# Altium PCB PCB1.pcbdoc (part 1 of 3)
Units mm, origin at the board's own origin, x right, y up, seen from the top; angles counter-clockwise.
Board outline 85.01 x 107.37 mm, 4 copper layers (Top Layer, Inner1, Inner2, Bottom Layer); 103 components, 145 nets, 649 pads, 270 vias.
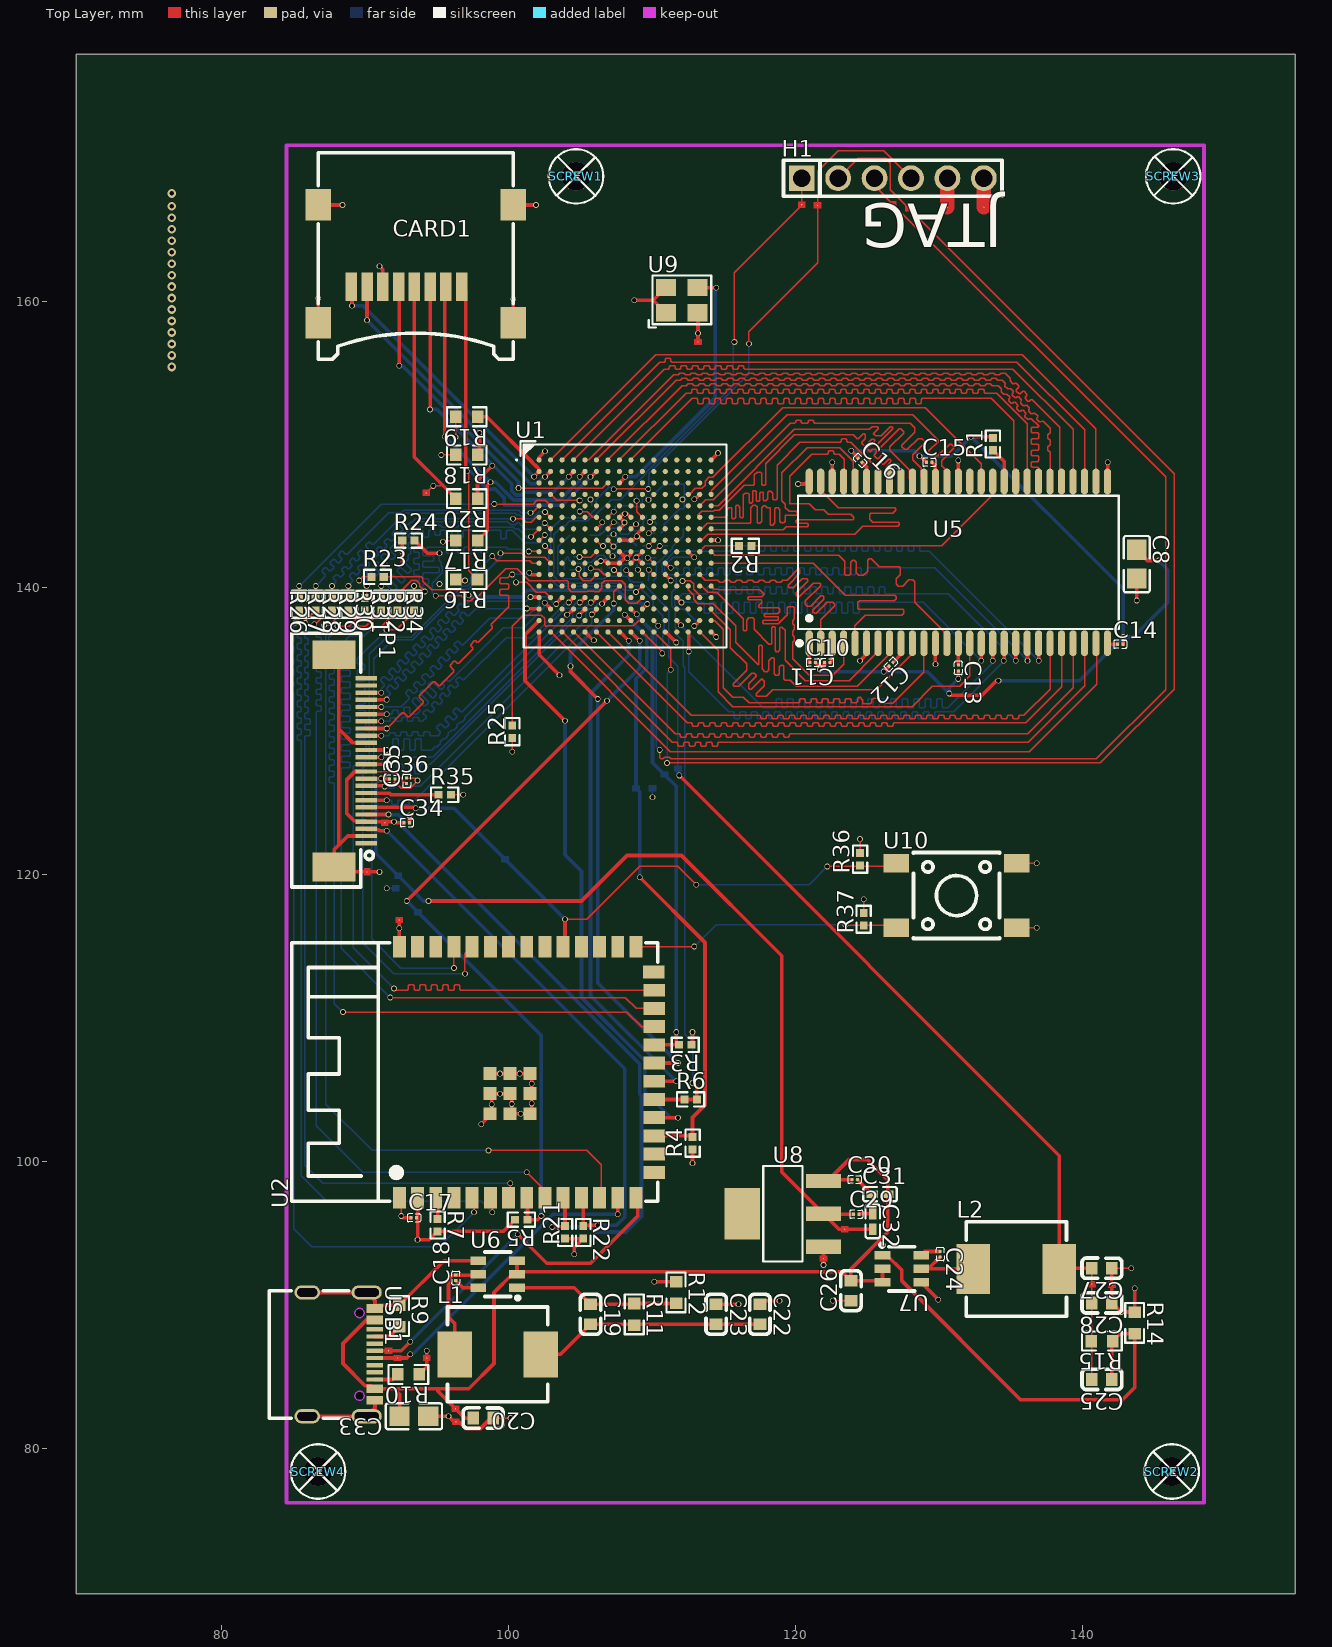
[diagram p0: Top Layer view]
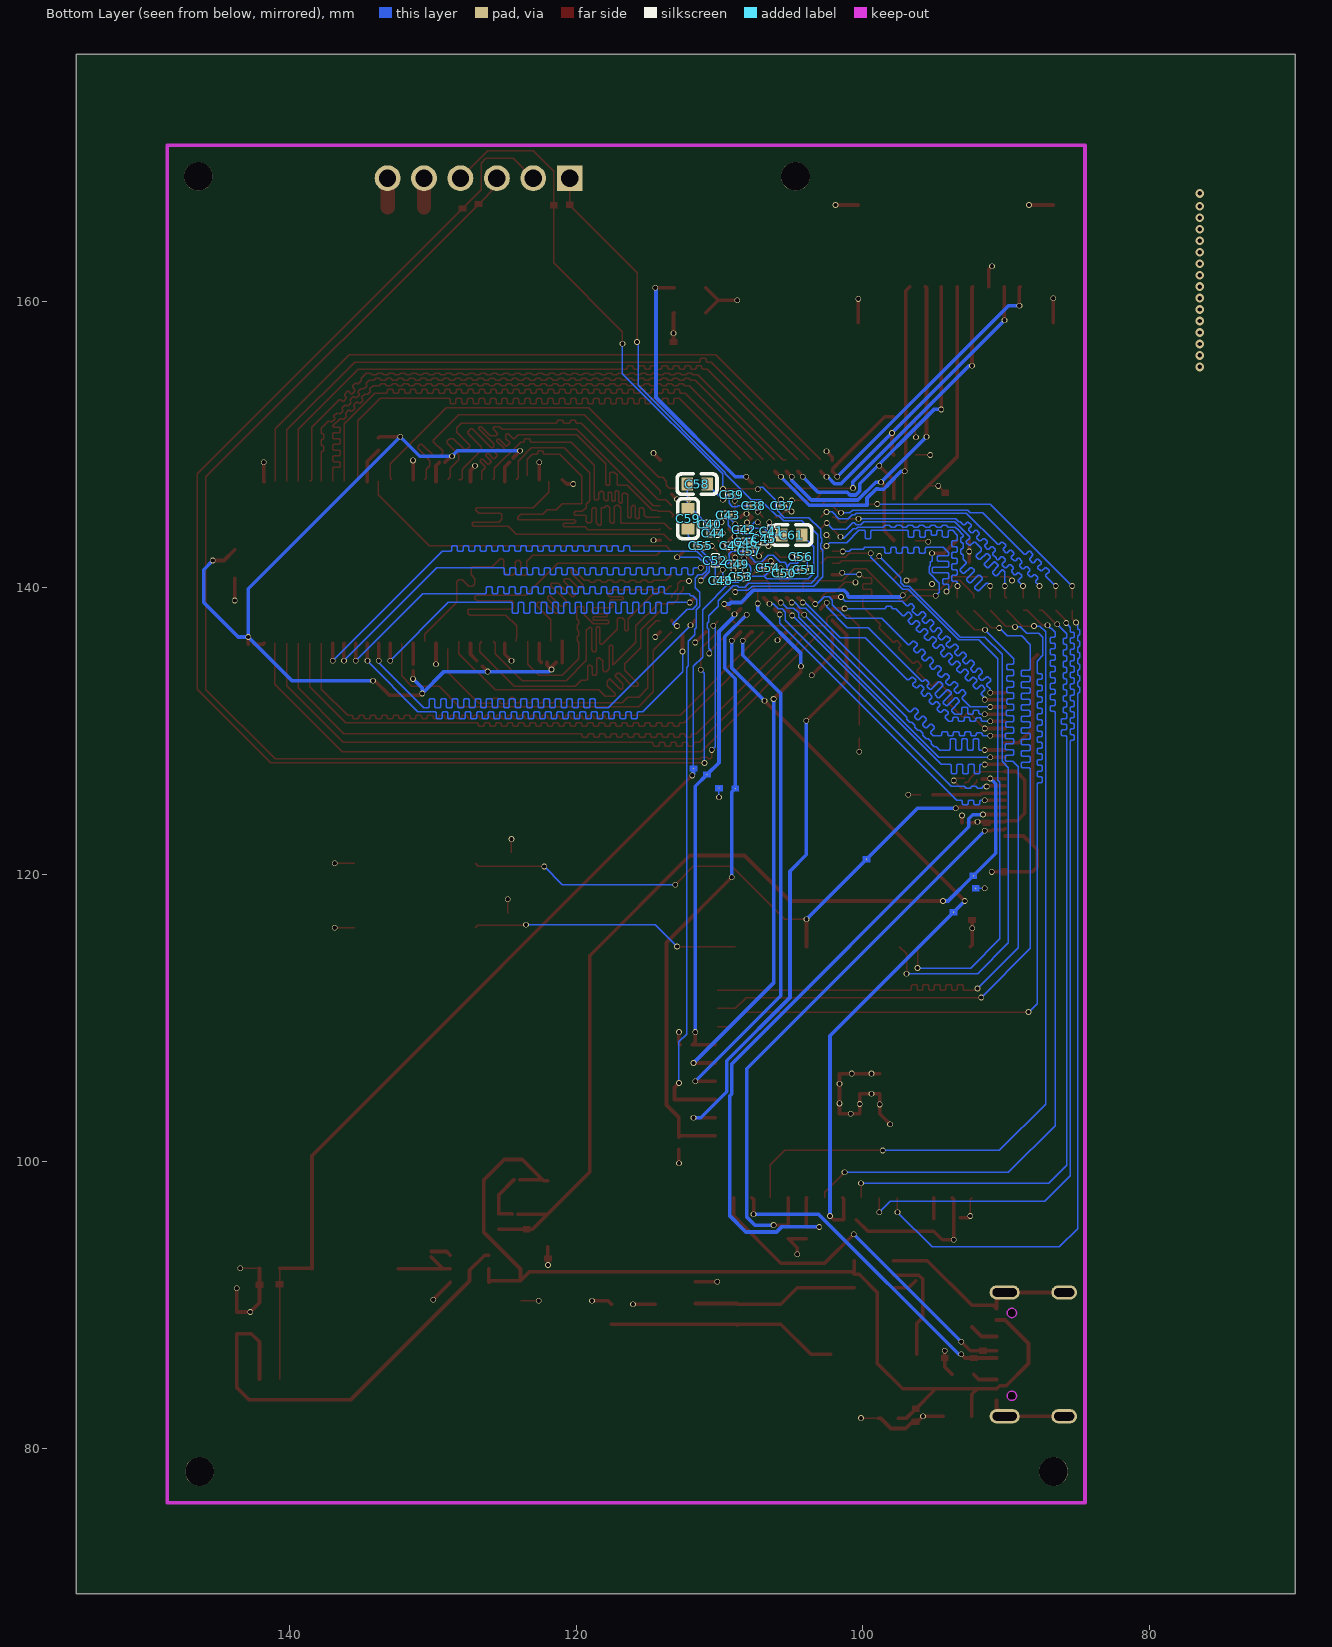
[diagram p1: Bottom Layer view, seen from below]
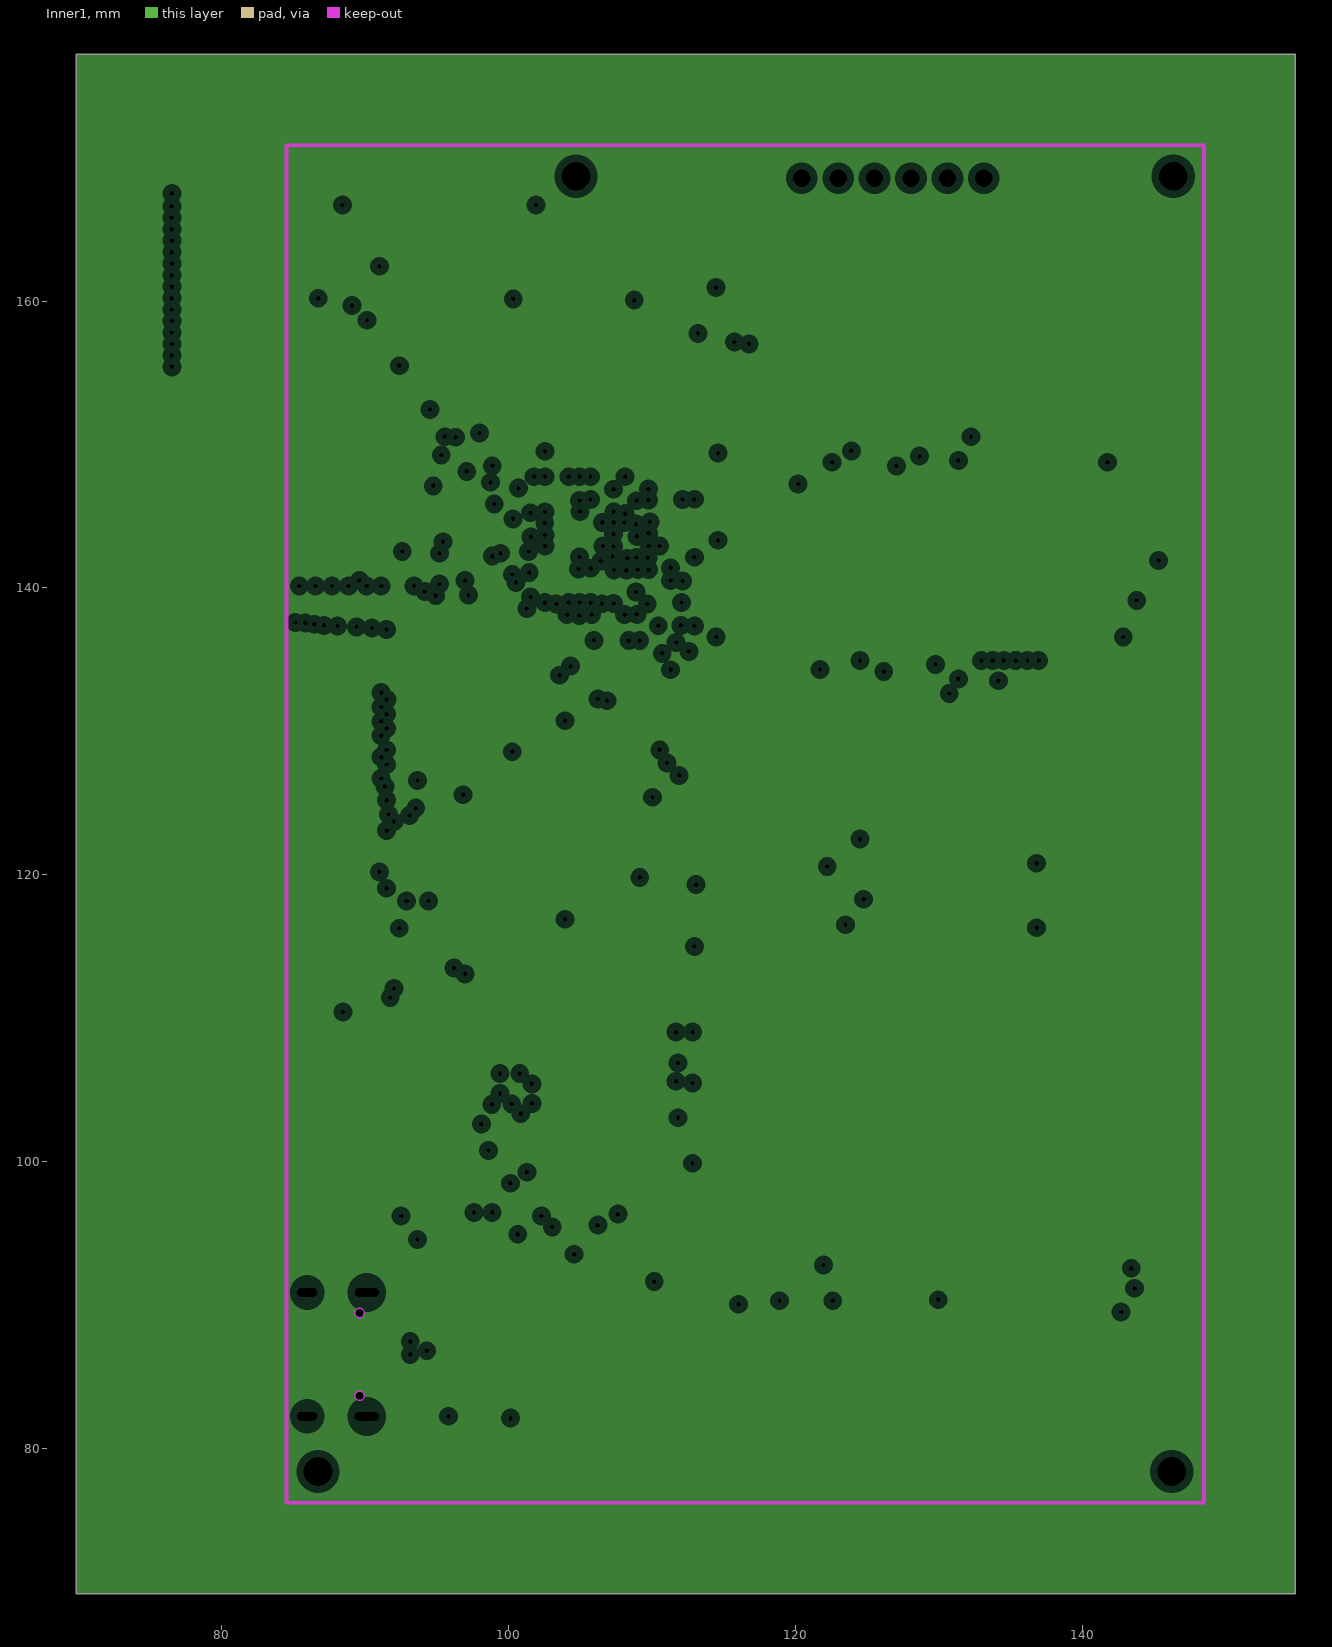
[diagram p2: Inner1, clearances drawn from the general rule]
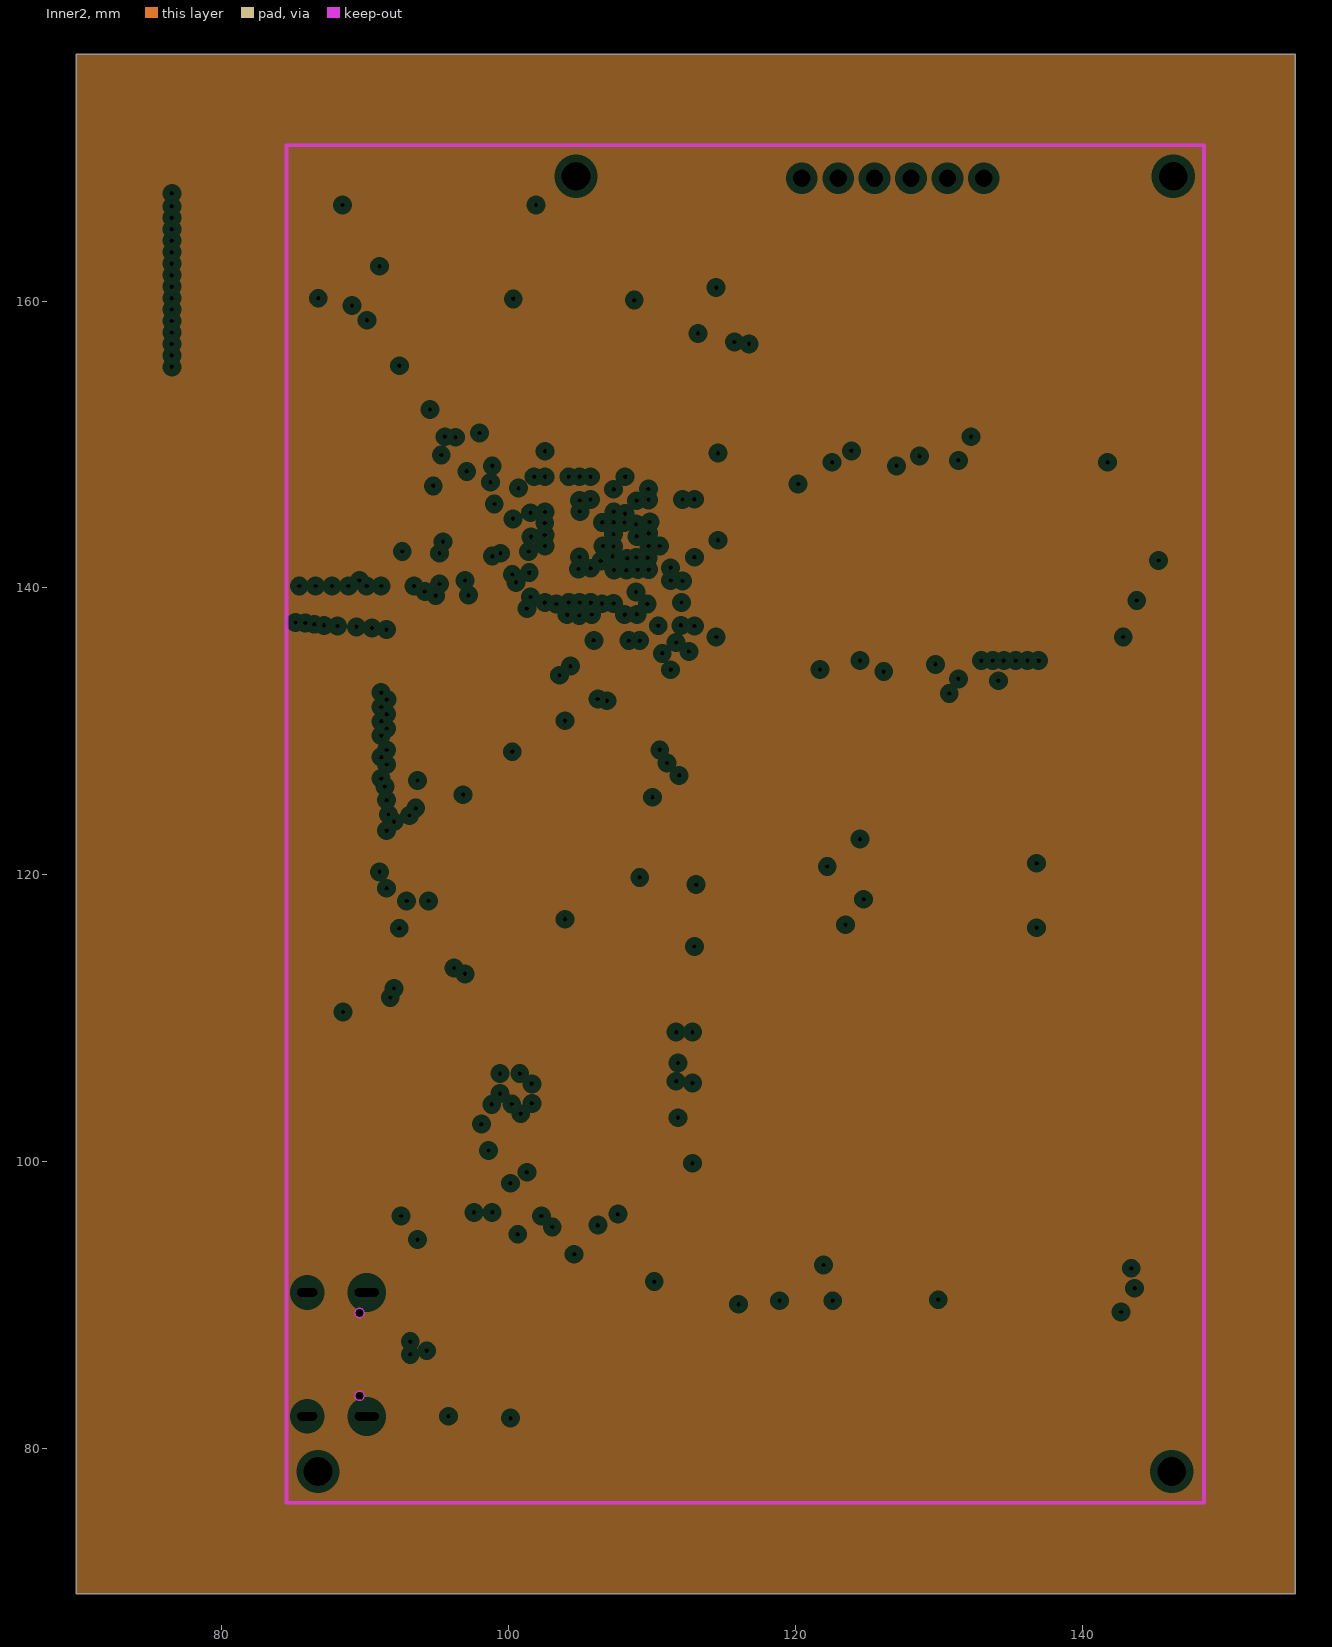
[diagram p3: Inner2, clearances drawn from the general rule]

## Layer stack, top to bottom
Top Layer: signal copper (thickness not stored)
Dielectric: dielectric 0.32, FR-4, Dk 4.8
Inner1: plane copper (thickness not stored)
Dielectric: dielectric 0.32, FR-4, Dk 4.8
Inner2: plane copper (thickness not stored)
Dielectric: dielectric 0.32, FR-4, Dk 4.8
Bottom Layer: signal copper (thickness not stored)

## Board outline
154.856,69.85 69.85,69.85 69.85,177.216 154.856,177.216

## Design rules (kind name [scope] priority, off if disabled: settings)
BoardOutlineClearance copperThickness1oz [All] p0: genericclearance=0.254 ignorepadtopadclearanceinfootprint=FALSE except(0: Arc-SplitContinuation Track-SplitContinuation SMDPad-SplitContinuation THPad-SplitContinuation Via-SplitContinuation Fill-SplitContinuation Poly-SplitContinuation Region-SplitContinuation Text-SplitContinuation; 0.152: Track-CutoutEdge SMDPad-CutoutEdge THPad-CutoutEdge Via-CutoutEdge Region-CutoutEdge; 0.3: Track-OutlineEdge SMDPad-OutlineEdge THPad-OutlineEdge Via-OutlineEdge Fill-OutlineEdge Region-OutlineEdge Poly-OutlineEdge Text-OutlineEdge Fill-CutoutEdge)
BoardOutlineClearance copperThickness2oz [All] p0: genericclearance=0.254 ignorepadtopadclearanceinfootprint=FALSE except(0: Arc-SplitContinuation Track-SplitContinuation SMDPad-SplitContinuation THPad-SplitContinuation Via-SplitContinuation Fill-SplitContinuation Poly-SplitContinuation Region-SplitContinuation Text-SplitContinuation; 0.152: Track-CutoutEdge SMDPad-CutoutEdge THPad-CutoutEdge Via-CutoutEdge Region-CutoutEdge; 0.3: Track-OutlineEdge SMDPad-OutlineEdge THPad-OutlineEdge Via-OutlineEdge Fill-OutlineEdge Region-OutlineEdge Poly-OutlineEdge Text-OutlineEdge Fill-CutoutEdge)
Clearance copperThickness1oz [(InNet('SD_A0') OR InNet('SD_A1') OR InNet('SD_A2') OR InNet('SD_A3') OR InNet('SD_A4') OR InNet('SD_A5') OR InNet('SD_A6') OR InNet('SD_A7') OR InNet('SD_A8') OR InNet('SD_A9') OR InNet('SD_A10') OR InNet('SD_A11') OR InNet('SD_A12') OR InNet('SD_DQ15') OR InNet('SD_DQ14') OR InNet('SD_DQ8') OR InNet('SD_BA0') OR InNet('SD_BA1') OR InNet('SD_DQ9') OR InNet('SD_DQ7') OR InNet('SD_CLK') OR InNet('SD_WE_N') OR InNet('SD_DQ10') OR InNet('SD_CAS_N') OR InNet('SD_DQM1') OR InNet('SD_DQ2') OR InNet('SD_DQ3') OR InNet('SD_DQ11') OR InNet('SD_DQ12') OR InNet('SD_DQ13') OR InNet('SD_DQ0') OR InNet('SD_DQ1') OR InNet('SD_CS_N') OR InNet('SD_RAS_N') OR InNet('SD_DQ4') OR InNet('SD_DQ6') OR InNet('$1N9241') OR InNet('$1N9192') OR InNet('GND') OR InNet('$1N9142') OR InNet('SD_DQ5') OR InNet('$1N9091') OR InNet('SD_DQM0') OR InNet('$1N9039') OR InNet('$1N8986') OR InNet('$1N8318') OR InNet('$1N9437') OR InNet('$1N9341') OR InNet('+3V3') OR InNet('$1N11348') OR InNet('DOUT') OR InNet('DIN') OR InNet('CCLK') OR InNet('DONE') OR InNet('PROGRAMN') OR InNet('INITN') OR InNet('$1N11975') OR InNet('DN') OR InNet('DP') OR InNet('$1N14459') OR InNet('$1N14416') OR InNet('$1N14567') OR InNet('+5V') OR InNet('$1N16833') OR InNet('$1N16832') OR InNet('+1V1') OR InNet('$1N16834') OR InNet('+1V8') OR InNet('$1N17349') OR InNet('$1N12557') OR InNet('$1N12553') OR InNet('M_D2') OR InNet('M_D3') OR InNet('M_CMD') OR InNet('M_CLK') OR InNet('M_D0') OR InNet('M_D1') OR InNet('SDA') OR InNet('SCL') OR InNet('RESET') OR InNet('VSYNC') OR InNet('HREF') OR InNet('Y9') OR InNet('MCLK') OR InNet('Y8') OR InNet('Y7') OR InNet('PCLK') OR InNet('Y6') OR InNet('Y2') OR InNet('Y5') OR InNet('Y3') OR InNet('Y4') OR InNet('$1N14571') OR InNet('$1N24422') OR InNet('$1N24377') OR InNet('$1N24492') OR InNet('CRYSTAL') OR InNet('SSPI_CS_N') OR InNet('D0') OR InNet('D1') OR InNet('D2') OR InNet('D4') OR InNet('D3') OR InNet('D5') OR InNet('D6') OR InNet('D7') OR InNet('RX') OR InNet('TX') OR InNet('$1N29790') OR InNet('$1N29833') OR InNet('$1N29916') OR InNet('$1N29959') OR InNet('$1N30002') OR InNet('$1N30085') OR InNet('$1N30089') OR InNet('$1N30093') OR InNet('TDO') OR InNet('TDI') OR InNet('TMS') OR InNet('TCK') OR InNet('$1N33205') OR InNet('PROGRAM') OR InNet('$1N36431') OR InNet('$1N36646') OR InNet('$1N36895') OR InNet('$1N37600') OR InNet('$1N37295') OR InNet('$1N36495') OR InNet('$1N36690') OR InNet('$1N36953') OR InNet('$1N37637') OR InNet('$1N37245') OR InNet('$1N37470') OR InNet('$1N36752') OR InNet('$1N37409') OR InNet('$1N36552') OR InNet('$1N37361') OR InNet('$1N36571') OR InNet('$1N36807') OR InNet('$1N37097') OR InNet('$1N37518') OR InNet('$1N37345') OR InNet('$1N37150') OR InNet('$1N47813') OR InNet('$1N41066'))] p1: gap=0.178 ignorepadtopadclearanceinfootprint=FALSE except(0.099: Track-Track; 0.152: Track-SMDPad SMDPad-SMDPad Track-THPad SMDPad-THPad THPad-THPad Track-Via SMDPad-Via THPad-Via Via-Via SMDPad-Fill THPad-Fill Via-Fill Fill-Fill Track-Region SMDPad-Region THPad-Region Via-Region Region-Region Track-Poly SMDPad-Poly THPad-Poly Via-Poly Fill-Poly Region-Poly Poly-Poly Track-Text SMDPad-Text THPad-Text Via-Text Fill-Text Region-Text Poly-Text Text-Text; 0.175: Track-Hole SMDPad-Hole THPad-Hole Via-Hole Fill-Hole Region-Hole Poly-Hole Text-Hole Sheet-Hole; 0.3: Track-Fill Fill-Region Track-Sheet SMDPad-Sheet THPad-Sheet Via-Sheet Fill-Sheet Region-Sheet Poly-Sheet Text-Sheet)
Clearance copperThickness2oz [All] p1: gap=0.178 ignorepadtopadclearanceinfootprint=FALSE except(0.152: Track-SMDPad SMDPad-SMDPad Track-THPad SMDPad-THPad THPad-THPad Track-Via SMDPad-Via THPad-Via Via-Via SMDPad-Fill THPad-Fill Via-Fill Fill-Fill Track-Region SMDPad-Region THPad-Region Via-Region Region-Region Track-Poly SMDPad-Poly THPad-Poly Via-Poly Fill-Poly Region-Poly Poly-Poly Track-Text SMDPad-Text THPad-Text Via-Text Fill-Text Region-Text Poly-Text Text-Text; 0.175: Track-Hole SMDPad-Hole THPad-Hole Via-Hole Fill-Hole Region-Hole Poly-Hole Text-Hole Sheet-Hole; 0.203: Track-Track; 0.3: Track-Fill Fill-Region Track-Sheet SMDPad-Sheet THPad-Sheet Via-Sheet Fill-Sheet Region-Sheet Poly-Sheet Text-Sheet)
DiffPairsRouting differentialPair [All] p1: maxuncoupledlength=10 minlimit=6 maxlimit=6 mostfreqgap=6 toplayer_minwidth=5 toplayer_prefwidth=10 toplayer_maxwidth=100 bottomlayer_minwidth=5 bottomlayer_prefwidth=10 bottomlayer_maxwidth=100
PasteMaskExpansion pasteMaskExpansion [All] p1: expansion=0
PlaneConnect innerPlane [All] p1: planeconnectstyle=Relief reliefexpansion=0.508 reliefentries=4 reliefconductorwidth=0.254 reliefairgap=0.254
PolygonConnect copperRegion [All] p1: connectstyle=Relief reliefentries=4 reliefconductorwidth=10 polygonreliefangle="90 Angle" airgapwidth=10
RoutingVias viaSize [All] p1: viastyle="Through Hole" holewidth=11.811 minholewidth=11.811 maxholewidth=248.0314 width=15.748 minwidth=15.748 maxwidth=393.7008
SolderMaskExpansion solderMaskExpansion [All] p1: useseparateexpansions=TRUE expansion=2 expansionbottom=2
Width copperThickness1oz [All] p1: maxlimit=100 minlimit=4 preferedwidth=4
Width copperThickness2oz [All] p1: maxlimit=100 minlimit=8 preferedwidth=10

## Components (designator, comment, footprint, x,y, rotation, side; value= is the part's Value field where it differs from the comment)
C8 "CL21A476MQYNNNE" C0805 143.815,141.656 r270 top
C10 "GRM022R60J104KE15D" C01005 121.209,134.798 r0 top
C11 "GRM022R60J104KE15D" C01005 122.225,134.798 r180 top
C12 "GRM022R60J104KE15D" C01005 126.67,134.671 r225 top
C13 "GRM022R60J104KE15D" C01005 131.369,134.417 r270 top
C14 "GRM022R60J104KE15D" C01005 142.672,136.068 r0 top
C15 "GRM022R60J104KE15D" C01005 129.337,148.768 r0 top
C16 "GRM022R60J104KE15D" C01005 124.511,148.895 r315 top
C17 "GRM022R60J104KE15D" C01005 93.396,96.063 r0 top
C18 "GRM022R60J104KE15D" C01005 96.317,91.872 r90 top
C19 "TCC0603X7R104K500CT" C0603 105.715,89.332 r270 top
C20 "TCC0603X5R226M6R3CT" C0603 98.222,82.093 r180 top
C22 "TCC0603X5R226M6R3CT" C0603 117.526,89.332 r270 top
C23 "TCC0603X5R226M6R3CT" C0603 114.478,89.332 r270 top
C24 "GRM022R60J104KE15D" C01005 130.099,93.523 r270 top
C25 "TCC0603X7R104K500CT" C0603 141.381,84.799 r180 top
C26 "TCC0603X5R226M6R3CT" C0603 123.876,90.983 r90 top
C27 "TCC0603X5R226M6R3CT" C0603 141.381,92.546 r180 top
C28 "TCC0603X5R226M6R3CT" C0603 141.381,90.133 r180 top
C29 "GRM022R60J104KE15D" C01005 124.257,96.317 r0 top
C30 "GRM022R60J104KE15D" C01005 124.13,98.73 r0 top
C31 "GRM155R60J106ME44D" C0402 125.908,97.714 r0 top
C32 "GRM155R60J106ME44D" C0402 125.4,95.809 r270 top
C33 "CL21A476MQYNNNE" C0805 93.396,82.22 r180 top
C34 "GRM022R60J104KE15D" C01005 92.888,123.622 r0 top
C35 "GRM022R60J104KE15D" C01005 92.888,126.543 r90 top
C36 "GRM022R60J104KE15D" C01005 91.872,126.67 r0 top
C37 "GRM022R60J104KE15D" C01005 105.588,145.72 r180 bottom
C38 "GRM022R60J104KE15D" C01005 107.62,145.72 r180 bottom
C39 "GRM022R60J104KE15D" C01005 109.144,146.482 r180 bottom
C40 "GRM022R60J104KE15D" C01005 110.668,144.45 r180 bottom
C41 "GRM022R60J104KE15D" C01005 106.35,143.942 r90 bottom
C42 "GRM022R60J104KE15D" C01005 108.255,144.069 r180 bottom
C43 "GRM022R60J104KE15D" C01005 109.398,145.085 r180 bottom
C44 "GRM022R60J104KE15D" C01005 110.414,143.815 r180 bottom
C45 "GRM022R60J104KE15D" C01005 106.858,143.434 r270 bottom
C46 "GRM022R60J104KE15D" C01005 108.128,143.18 r180 bottom
C47 "GRM022R60J104KE15D" C01005 109.144,142.926 r0 bottom
C48 "GRM022R60J104KE15D" C01005 109.906,140.513 r0 bottom
C49 "GRM022R60J104KE15D" C01005 108.763,141.656 r180 bottom
C50 "GRM022R60J104KE15D" C01005 105.486,141.021 r180 bottom
C51 "GRM022R60J104KE15D" C01005 104.064,141.275 r180 bottom
C52 "GRM022R60J104KE15D" C01005 110.287,141.91 r270 bottom
C53 "GRM022R60J104KE15D" C01005 108.509,140.767 r180 bottom
C54 "GRM022R60J104KE15D" C01005 106.604,141.402 r180 bottom
C55 "GRM022R60J104KE15D" C01005 111.303,142.926 r0 bottom
C56 "GRM022R60J104KE15D" C01005 104.318,142.164 r180 bottom
C57 "GRM022R60J104KE15D" C01005 107.874,142.545 r0 bottom
C58 "TCC0603X5R226M6R3CT" C0603 111.557,147.244 r180 bottom
C59 "TCC0603X5R226M6R3CT" C0603 112.192,144.831 r90 bottom
C61 "TCC0603X5R226M6R3CT" C0603 104.953,143.688 r180 bottom
CARD1 "DS1139-06-08SS4BSR" TF-SMD_DS1139-06-08SS4BSR 93.523,162.611 r0 top
H1 "2.54-1x6P直针" HDR-TH_6P-P2.54-V-M-1 126.797,168.58 r0 top
L1 "FXL0630-6R8-M" IND-SMD_L7.0-W6.6 99.238,86.538 r0 top
L2 "FXL0630-100-M" IND-SMD_L7.3-W6.8 135.417,92.501 r0 top
P1 "AFC07-S24FCC-00" FPC-SMD_AFC07-S24FCC-00 88.951,127.94 r270 top
R1 "0402WGF1002TCE" R0402 133.782,150.038 r90 top
R2 "0402WGF330JTCE" R0402 116.51,142.926 r180 top
R3 "0402WGF1002TCE" R0402 112.319,108.128 r180 top
R4 "0402WGF1002TCE" R0402 112.827,101.27 r90 top
R5 "0402WGF1002TCE" R0402 100.889,95.936 r180 top
R6 "0402WGF330JTCE" R0402 112.7,104.318 r0 top
R7 "0402WGF1002TCE" R0402 95.047,95.555 r270 top
R9 "0603WAF5101T5E" R0603 92.38,89.205 r270 top
R10 "0603WAF5101T5E" R0603 93.015,85.141 r180 top
R11 "FRC0603F1963TS" R0603 108.763,89.332 r270 top
R12 "FRC0603F6202TS" R0603 111.684,90.856 r270 top
R14 "FRC0603F6202TS" R0603 143.667,88.736 r270 top
R15 "0603WAF2322T5E" R0603 141.381,87.466 r180 top
R16 "FRC0603F6202TS" R0603 97.075,140.589 r180 top
R17 "FRC0603F6202TS" R0603 97.079,143.307 r180 top
R18 "FRC0603F6202TS" R0603 97.079,149.276 r180 top
R19 "FRC0603F6202TS" R0603 97.079,151.943 r180 top
R20 "FRC0603F6202TS" R0603 97.079,146.228 r180 top
R21 "0402WGF1002TCE" R0402 103.937,95.047 r270 top
R22 "0402WGF1002TCE" R0402 105.207,95.047 r270 top
R23 "0402WGF1002TCE" R0402 90.856,140.767 r0 top
R24 "0402WGF1002TCE" R0402 93.015,143.307 r0 top
R25 "0402WGF1002TCE" R0402 100.254,129.972 r90 top
R26 "0402WGF330JTCE" R0402 85.395,138.862 r270 top
R27 "0402WGF330JTCE" R0402 86.538,138.862 r270 top
R28 "0402WGF330JTCE" R0402 87.681,138.862 r270 top
R29 "0402WGF330JTCE" R0402 88.824,138.862 r270 top
R30 "0402WGF330JTCE" R0402 89.967,138.862 r270 top
R31 "0402WGF330JTCE" R0402 91.11,138.862 r270 top
R32 "0402WGF330JTCE" R0402 92.253,138.862 r270 top
R34 "0402WGF330JTCE" R0402 93.396,138.862 r270 top
R35 "0402WGF1002TCE" R0402 95.541,125.576 r0 top
R36 "0402WGF1002TCE" R0402 124.511,121.082 r90 top
R37 "0402WGF1002TCE" R0402 124.765,116.891 r90 top
SCREW1 "Screw-Hole-M2" Screw-Hole-M2 104.699,168.707 r0 top
SCREW2 "Screw-Hole-M2" Screw-Hole-M2 146.255,78.368 r0 top
SCREW3 "Screw-Hole-M2" Screw-Hole-M2 146.355,168.707 r0 top
SCREW4 "Screw-Hole-M2" Screw-Hole-M2 86.707,78.368 r0 top
U1 "LFE5U-25F-6BG256C" CABGA-256_L14.0-W14.0-R16-C16-P0.80-TL 108.128,142.926 r0 top
U2 "ESP32-S3-WROOM-1-N16R2" WIRELM-SMD_ESP32-S3-WROOM-1 101.27,106.223 r90 top
U5 "W9825G6KH-6" TSOP-54_L22.2-W10.2-P0.80-LS11.8-BL 131.369,141.783 r0 top
U6 "AP63200WU-7" SOT-23-6_L2.9-W1.6-P0.95-LS2.8-BR 99.238,92.126 r0 top
U7 "AP63200WU-7" SOT-23-6_L2.9-W1.6-P0.95-LS2.8-BR 127.432,92.507 r180 top
U8 "AMS1117-1.8_C6185" SOT-223-4_L6.5-W3.5-P2.30-LS7.0-BR 119.13,96.346 r0 top
U9 "XOS32024000LT00351005" OSC-SMD_4P-L3.2-W2.5-BL 112.065,160.071 r0 top
U10 "TPS645-5NC60" SW-SMD_4P-L6.0-W6.0-P4.50-LS9.2 131.242,118.542 r0 top
USB1 "TYPE-C16PIN" USB-C-SMD_TYPE-C16PIN 88.316,86.538 r270 top

## Footprints (in the part's own frame and the unit in brackets; to place one, negate y for a bottom-side part, rotate by r counter-clockwise, add the part's x,y. Pads: shape width x height; smd on the part's side, far side on the other; paste and mask are expansions set on the pad)
C0402 [mm]
  rect 0.79x0.54 smd: 1(-0.545,0) 2(0.545,0)
  silkscreen extent -1.17,-0.5 1.17,0.5
C0603 [mm]
  rect 0.8x0.9 smd: 1(-0.7,0) 2(0.7,0)
  silkscreen extent -1.39,-0.71 1.39,0.71
C0805 [mm]
  rect 1.41x1.35 smd: 1(-1,0) 2(1,0)
  silkscreen extent -1.96,-0.9 1.96,0.9
C01005 [mm]
  rect 0.21x0.22 smd: 1(-0.195,0) 2(0.195,0)
  silkscreen extent -0.46,-0.27 0.46,0.27
CABGA-256_L14.0-W14.0-R16-C16-P0.80-TL [mm]
  round 0.36 smd: A1(-6,6) A2(-5.2,6) A3(-4.4,6) A4(-3.6,6) A5(-2.8,6) A6(-2,6) A7(-1.2,6) A8(-0.4,6) A9(0.4,6) A10(1.2,6) A11(2,6) A12(2.8,6) A13(3.6,6) A14(4.4,6) A15(5.2,6) A16(6,6) B1(-6,5.2) B2(-5.2,5.2) B3(-4.4,5.2) B4(-3.6,5.2) B5(-2.8,5.2) B6(-2,5.2) B7(-1.2,5.2) B8(-0.4,5.2) B9(0.4,5.2) B10(1.2,5.2) B11(2,5.2) B12(2.8,5.2) B13(3.6,5.2) B14(4.4,5.2) B15(5.2,5.2) B16(6,5.2) C1(-6,4.4) C2(-5.2,4.4) C3(-4.4,4.4) C4(-3.6,4.4) C5(-2.8,4.4) C6(-2,4.4) C7(-1.2,4.4) C8(-0.4,4.4) C9(0.4,4.4) C10(1.2,4.4) C11(2,4.4) C12(2.8,4.4) C13(3.6,4.4) C14(4.4,4.4) C15(5.2,4.4) C16(6,4.4) D1(-6,3.6) D2(-5.2,3.6) D3(-4.4,3.6) D4(-3.6,3.6) D5(-2.8,3.6) D6(-2,3.6) D7(-1.2,3.6) D8(-0.4,3.6) D9(0.4,3.6) D10(1.2,3.6) D11(2,3.6) D12(2.8,3.6) D13(3.6,3.6) D14(4.4,3.6) D15(5.2,3.6) D16(6,3.6) E1(-6,2.8) E2(-5.2,2.8) E3(-4.4,2.8) E4(-3.6,2.8) E5(-2.8,2.8) E6(-2,2.8) E7(-1.2,2.8) E8(-0.4,2.8) E9(0.4,2.8) E10(1.2,2.8) E11(2,2.8) E12(2.8,2.8) E13(3.6,2.8) E14(4.4,2.8) E15(5.2,2.8) E16(6,2.8) F1(-6,2) F2(-5.2,2) F3(-4.4,2) F4(-3.6,2) F5(-2.8,2) F6(-2,2) F7(-1.2,2) F8(-0.4,2) F9(0.4,2) F10(1.2,2) F11(2,2) F12(2.8,2) F13(3.6,2) F14(4.4,2) F15(5.2,2) F16(6,2) G1(-6,1.2) G2(-5.2,1.2) G3(-4.4,1.2) G4(-3.6,1.2) G5(-2.8,1.2) G6(-2,1.2) G7(-1.2,1.2) G8(-0.4,1.2) G9(0.4,1.2) G10(1.2,1.2) G11(2,1.2) G12(2.8,1.2) G13(3.6,1.2) G14(4.4,1.2) G15(5.2,1.2) G16(6,1.2) H1(-6,0.4) H2(-5.2,0.4) H3(-4.4,0.4) H4(-3.6,0.4) H5(-2.8,0.4) H6(-2,0.4) H7(-1.2,0.4) H8(-0.4,0.4) H9(0.4,0.4) H10(1.2,0.4) H11(2,0.4) H12(2.8,0.4) H13(3.6,0.4) H14(4.4,0.4) H15(5.2,0.4) H16(6,0.4) J1(-6,-0.4) J2(-5.2,-0.4) J3(-4.4,-0.4) J4(-3.6,-0.4) J5(-2.8,-0.4) J6(-2,-0.4) J7(-1.2,-0.4) J8(-0.4,-0.4) J9(0.4,-0.4) J10(1.2,-0.4) J11(2,-0.4) J12(2.8,-0.4) J13(3.6,-0.4) J14(4.4,-0.4) J15(5.2,-0.4) J16(6,-0.4) K1(-6,-1.2) K2(-5.2,-1.2) K3(-4.4,-1.2) K4(-3.6,-1.2) K5(-2.8,-1.2) K6(-2,-1.2) K7(-1.2,-1.2) K8(-0.4,-1.2) K9(0.4,-1.2) K10(1.2,-1.2) K11(2,-1.2) K12(2.8,-1.2) K13(3.6,-1.2) K14(4.4,-1.2) K15(5.2,-1.2) K16(6,-1.2) L1(-6,-2) L2(-5.2,-2) L3(-4.4,-2) L4(-3.6,-2) L5(-2.8,-2) L6(-2,-2) L7(-1.2,-2) L8(-0.4,-2) L9(0.4,-2) L10(1.2,-2) L11(2,-2) L12(2.8,-2) L13(3.6,-2) L14(4.4,-2) L15(5.2,-2) L16(6,-2) M1(-6,-2.8) M2(-5.2,-2.8) M3(-4.4,-2.8) M4(-3.6,-2.8) M5(-2.8,-2.8) M6(-2,-2.8) M7(-1.2,-2.8) M8(-0.4,-2.8) M9(0.4,-2.8) M10(1.2,-2.8) M11(2,-2.8) M12(2.8,-2.8) M13(3.6,-2.8) M14(4.4,-2.8) M15(5.2,-2.8) M16(6,-2.8) N1(-6,-3.6) N2(-5.2,-3.6) N3(-4.4,-3.6) N4(-3.6,-3.6) N5(-2.8,-3.6) N6(-2,-3.6) N7(-1.2,-3.6) N8(-0.4,-3.6) N9(0.4,-3.6) N10(1.2,-3.6) N11(2,-3.6) N12(2.8,-3.6) N13(3.6,-3.6) N14(4.4,-3.6) N15(5.2,-3.6) N16(6,-3.6) P1(-6,-4.4) P2(-5.2,-4.4) P3(-4.4,-4.4) P4(-3.6,-4.4) P5(-2.8,-4.4) P6(-2,-4.4) P7(-1.2,-4.4) P8(-0.4,-4.4) P9(0.4,-4.4) P10(1.2,-4.4) P11(2,-4.4) P12(2.8,-4.4) P13(3.6,-4.4) P14(4.4,-4.4) P15(5.2,-4.4) P16(6,-4.4) R1(-6,-5.2) R2(-5.2,-5.2) R3(-4.4,-5.2) R4(-3.6,-5.2) R5(-2.8,-5.2) R6(-2,-5.2) R7(-1.2,-5.2) R8(-0.4,-5.2) R9(0.4,-5.2) R10(1.2,-5.2) R11(2,-5.2) R12(2.8,-5.2) R13(3.6,-5.2) R14(4.4,-5.2) R15(5.2,-5.2) R16(6,-5.2) T1(-6,-6) T2(-5.2,-6) T3(-4.4,-6) T4(-3.6,-6) T5(-2.8,-6) T6(-2,-6) T7(-1.2,-6) T8(-0.4,-6) T9(0.4,-6) T10(1.2,-6) T11(2,-6) T12(2.8,-6) T13(3.6,-6) T14(4.4,-6) T15(5.2,-6) T16(6,-6)
  silkscreen extent -7.63,-7.08 7.08,7.3
FPC-SMD_AFC07-S24FCC-00 [mm]
  rect 0.3x1.5 smd: 1(5.745,1.129) 2(5.245,1.129) 3(4.746,1.129) 4(4.245,1.129) 5(3.746,1.129) 6(3.245,1.129) 7(2.746,1.129) 8(2.245,1.129) 9(1.746,1.129) 10(1.245,1.129) 11(0.746,1.129) 12(0.245,1.129) 13(-0.254,1.129) 14(-0.755,1.129) 15(-1.251,1.13) 16(-1.754,1.13) 17(-2.254,1.128) 18(-2.754,1.129) 19(-3.254,1.129) 20(-3.756,1.132) 21(-4.256,1.132) 22(-4.756,1.132) 23(-5.256,1.132) 24(-5.756,1.132)
  rect 2x3 smd: 25(-7.401,-1.132) 26(7.401,-1.125)
  silkscreen extent -8.89,-4.07 8.8,1.61
HDR-TH_6P-P2.54-V-M-1 [mm]
  rect 1.8x1.8 hole 1.2: 1(-6.35,0)
  round 1.8 hole 1.2: 2(-3.81,0) 3(-1.27,0) 4(1.27,0) 5(3.81,0) 6(6.35,0)
  silkscreen extent -7.62,-1.25 7.62,1.25
IND-SMD_L7.0-W6.6 [mm]
  rect 2.4x3.2 smd: 1(-3,0) 2(3,0)
  silkscreen extent -3.5,-3.3 3.5,3.3
IND-SMD_L7.3-W6.8 [mm]
  rect 2.35x3.5 smd: 1(-3,0) 2(3,0)
  silkscreen extent -3.5,-3.3 3.5,3.3
OSC-SMD_4P-L3.2-W2.5-BL [mm]
  rect 1.4x1.2 smd: 1(-1.1,-0.875) 2(1.1,-0.875) 3(1.1,0.875) 4(-1.1,0.875)
  silkscreen extent -2.29,-1.9 2.07,1.72
R0402 [mm]
  rect 0.566x0.54 smd: 1(-0.433,0) 2(0.433,0)
  silkscreen extent -0.94,-0.5 0.94,0.5
R0603 [mm]
  rect 0.806x0.864 smd: 1(-0.753,0) 2(0.753,0)
  silkscreen extent -1.39,-0.66 1.39,0.66
Screw-Hole-M2 [mm]
  round 2 hole 2: 1(0,0)
  silkscreen extent -1.9,-1.9 1.9,1.9
SOT-23-6_L2.9-W1.6-P0.95-LS2.8-BR [mm]
  rect 1.1x0.6 smd: 1(1.35,-0.95) 2(1.35,0) 3(1.35,0.95) 4(-1.35,0.95) 5(-1.35,0) 6(-1.35,-0.95)
  silkscreen extent -0.9,-1.78 1.52,1.55
SOT-223-4_L6.5-W3.5-P2.30-LS7.0-BR [mm]
  rect 2.47x0.98 smd: 1(2.835,-2.3) 2(2.835,0) 3(2.835,2.3)
  rect 2.47x3.6 smd: 4(-2.835,0)
  silkscreen extent -1.37,-3.33 1.37,3.33
SW-SMD_4P-L6.0-W6.0-P4.50-LS9.2 [mm]
  rect 1.8x1.3 smd: 1(-4.2,2.25) 2(4.2,2.25) 3(-4.2,-2.25) 4(4.2,-2.25)
  silkscreen extent -3,-3 3,3
TF-SMD_DS1139-06-08SS4BSR [mm]
  rect 0.8x2 smd: 1(3.2,-1.6) 2(2.1,-1.6) 3(1,-1.6) 4(-0.1,-1.6) 5(-1.2,-1.6) 6(-2.3,-1.6) 7(-3.4,-1.6) 8(-4.5,-1.6)
  rect 1.8x2.2 smd: 9(-6.8,4.1) 10(-6.8,-4.1) 11(6.8,-4.1) 12(6.8,4.1)
  silkscreen extent -6.8,-6.65 6.8,7.75
TSOP-54_L22.2-W10.2-P0.80-LS11.8-BL [mm]
  oval 0.5x1.8 smd: 1(-10.4,-5.642) 2(-9.6,-5.642) 3(-8.8,-5.642) 4(-8,-5.642) 5(-7.2,-5.642) 6(-6.4,-5.642) 7(-5.6,-5.642) 8(-4.8,-5.642) 9(-4,-5.642) 10(-3.2,-5.642) 11(-2.4,-5.642) 12(-1.6,-5.642) 13(-0.8,-5.642) 14(0,-5.642) 15(0.8,-5.642) 16(1.6,-5.642) 17(2.4,-5.642) 18(3.2,-5.642) 19(4,-5.642) 20(4.8,-5.642) 21(5.6,-5.642) 22(6.4,-5.642) 23(7.2,-5.642) 24(8,-5.642) 25(8.8,-5.642) 26(9.6,-5.642) 27(10.4,-5.642) 28(10.4,5.642) 29(9.6,5.642) 30(8.8,5.642) 31(8,5.642) 32(7.2,5.642) 33(6.4,5.642) 34(5.6,5.642) 35(4.8,5.642) 36(4,5.642) 37(3.2,5.642) 38(2.4,5.642) 39(1.6,5.642) 40(0.8,5.642) 41(0,5.642) 42(-0.8,5.642) 43(-1.6,5.642) 44(-2.4,5.642) 45(-3.2,5.642) 46(-4,5.642) 47(-4.8,5.642) 48(-5.6,5.642) 49(-6.4,5.642) 50(-7.2,5.642) 51(-8,5.642) 52(-8.8,5.642) 53(-9.6,5.642) 54(-10.4,5.642)
  silkscreen extent -11.23,-5.79 11.19,4.65
USB-C-SMD_TYPE-C16PIN [mm]
  oval 1x2.1 hole 0.6 slot 1.7 at 90 deg: 1(-4.32,1.787) 2(4.32,1.787)
  oval 1x1.8 hole 0.6 slot 1.4 at 90 deg: 3(-4.32,-2.362) 4(4.32,-2.362)
  rect 0.6x1.15 smd: A1B12(-3.2,2.362) A4B9(-2.4,2.362) B1A12(3.2,2.362) B4A9(2.4,2.362)
  rect 0.3x1.15 smd: A5(-1.25,2.362) A6(-0.25,2.362) A7(0.25,2.362) A8(1.25,2.362) B5(1.75,2.362) B6(0.75,2.362) B7(-0.75,2.362) B8(-1.75,2.362)
  Board Outline Layer circle w0.005: c2.89,1.288 r0.325
  Board Outline Layer circle w0.005: c-2.89,1.288 r0.325
  Board Outline Layer region: 2.89,1.613 3.031,1.581 3.144,1.491 3.207,1.36 3.207,1.216 3.144,1.085 3.031,0.995 2.89,0.963 2.89,0.963 2.749,0.995 2.636,1.085 2.573,1.216 2.573,1.36 2.636,1.491 2.749,1.581 2.89,1.613
  Board Outline Layer region: -2.89,1.613 -2.749,1.581 -2.636,1.491 -2.573,1.36 -2.573,1.216 -2.636,1.085 -2.749,0.995 -2.89,0.963 -2.89,0.963 -3.031,0.995 -3.144,1.085 -3.207,1.216 -3.207,1.36 -3.144,1.491 -3.031,1.581 -2.89,1.613
  Multi-Layer board cut-out: 2.89,1.613 3.031,1.581 3.144,1.491 3.207,1.36 3.207,1.216 3.144,1.085 3.031,0.995 2.89,0.963 2.89,0.963 2.749,0.995 2.636,1.085 2.573,1.216 2.573,1.36 2.636,1.491 2.749,1.581 2.89,1.613
  Multi-Layer board cut-out: -2.89,1.613 -2.749,1.581 -2.636,1.491 -2.573,1.36 -2.573,1.216 -2.636,1.085 -2.749,0.995 -2.89,0.963 -2.89,0.963 -3.031,0.995 -3.144,1.085 -3.207,1.216 -3.207,1.36 -3.144,1.491 -3.031,1.581 -2.89,1.613
  silkscreen extent -4.45,-5 4.45,0.52
WIRELM-SMD_ESP32-S3-WROOM-1 [mm]
  rect 1.5x0.9 smd: 1(-8.75,8.895) 2(-8.75,7.625) 3(-8.75,6.355) 4(-8.75,5.085) 5(-8.75,3.815) 6(-8.75,2.545) 7(-8.75,1.275) 8(-8.75,0.005) 9(-8.75,-1.265) 10(-8.75,-2.535) 11(-8.75,-3.805) 12(-8.75,-5.075) 13(-8.75,-6.345) 14(-8.75,-7.615) 27(8.75,-7.615) 28(8.75,-6.345) 29(8.75,-5.075) 30(8.75,-3.805) 31(8.75,-2.535) 32(8.75,-1.265) 33(8.75,0.005) 34(8.75,1.275) 35(8.75,2.545) 36(8.75,3.815) 37(8.75,5.085) 38(8.75,6.355) 39(8.75,7.625) 40(8.75,8.895)
  rect 0.9x1.5 smd: 15(-6.985,-8.895) 16(-5.715,-8.895) 17(-4.445,-8.895) 18(-3.175,-8.895) 19(-1.905,-8.895) 20(-0.635,-8.895) 21(0.635,-8.895) 22(1.905,-8.895) 23(3.175,-8.895) 24(4.445,-8.895) 25(5.715,-8.895) 26(6.985,-8.865)
  rect 0.9x0.9 smd: 41(-2.9,-0.225) 41(-2.9,1.175) 41(-2.9,2.575) 41(-1.5,2.575) 41(-1.5,-0.225) 41(-1.5,1.175) 41(-0.1,2.575) 41(-0.1,1.175) 41(-0.1,-0.225)
  silkscreen extent -9,-9.14 9.02,16.39

## Free pads (board coordinates)
  round 0.08 smd: 55(90.131,120.193) 55(91.364,123.622) 55(91.618,86.792) 55(92.253,86.284) 55(92.375,116.832) 55(94.254,146.63) 55(94.285,86.284) 55(96.298,82.747) 55(96.317,81.839) 55(113.208,157.15) 55(120.444,166.728) 55(121.549,166.687) 55(121.965,93.234) 55(123.445,95.264) 55(126.796,166.776) 55(127.919,166.471) 55(130.607,166.548) 55(133.147,166.548) 55(140.681,91.433) 55(142.081,91.393)
  round 0.08 smd far side: 55(92.126,119.05) 55(92.294,119.92) 55(93.673,117.376) 55(99.749,121.074) 55(108.89,126.014) 55(110.033,126.035) 55(110.865,126.981) 55(111.811,127.407)

## Via types
v1: diameter 0.4, hole 0.3, Top Layer to Bottom Layer, 254 vias
v2: diameter 0.61, hole 0.305, Top Layer to Bottom Layer, 16 vias

## Nets (pads, with @x,y where several pads share a name; then routed paths per layer and width w, separated by ;. In a path a pad name is that pad's centre, name@x,y a point inside that pad or via, vN(x,y) a via of type N, cw(c..) or ccw(c..) an arc to the next point about the centre after c; other vN are vias at no path point)
$1N8318: C15.2 U5.43 | length 1.4
  Top Layer w0.254: C15.2@129.532,148.768 129.769,148.531 U5.43@129.769,147.425
$1N8986: C16.2 U5.49 | length 1.5
  Top Layer w0.254: C16.2@124.649,148.757 124.969,148.437 U5.49@124.969,147.425
$1N9039: C14.1 U5.27 | length 0.7
  Top Layer w0.254: U5.27@141.769,136.141 141.842,136.068 C14.1@142.477,136.068
$1N9091: C13.1 U5.14 | length 1.5
  Top Layer w0.254: C13.1@131.369,134.671 U5.14@131.369,136.141
$1N9142: C12.1 U5.9 | length 1.4
  Top Layer w0.254: 126.924,134.925 127.369,135.37 U5.9@127.369,136.141
$1N9192: C11.1 U5.3 | length 1.4
  Top Layer w0.254: C11.1@122.42,134.798 122.569,134.947 U5.3@122.569,136.141
$1N9241: C10.1 U5.1 | length 1.5
  Top Layer w0.254: C10.1@120.969,134.798 U5.1@120.969,136.268
$1N9341: C8.1 C10.2 C11.2 C12.2 C13.2 C14.2 C15.1 C16.1 R1.2 | length 67.2
  Top Layer w0.254: C10.2@121.404,134.798 121.717,134.485 v1(121.717,134.311) 122.03,134.624 C11.2@122.03,134.798 ; v1(123.906,149.56) 124.373,149.093 C16.1@124.373,149.033 ; v1(126.162,134.163) C12.2@126.532,134.533 ; v1(128.662,149.189) 128.721,149.189 C15.1@129.142,148.768 ; v1(130.734,132.639) 130.861,132.512 133.02,132.512 134.036,133.528 v1(134.163,133.528) ; v1(131.369,133.655) C13.2@131.369,134.222 ; v1(132.258,150.546) 133.707,150.546 R1.2@133.782,150.471 ; C14.2@142.867,136.068 v1(142.867,136.576) ; C8.1@143.815,142.656 144.561,141.91 v1(145.339,141.91)
  Bottom Layer w0.254: v1(121.717,134.311) 121.865,134.163 v1(126.162,134.163) 129.21,134.163 v1(130.734,132.639) 130.734,133.02 v1(131.369,133.655) ; v1(123.906,149.56) 128.291,149.56 v1(128.662,149.189) 130.901,149.189 v1(132.258,150.546) 142.867,139.937 v1(142.867,136.576) ; v1(134.163,133.528) 139.819,133.528 v1(142.867,136.576) ; v1(145.339,141.91) 145.974,141.275 145.974,138.989 143.561,136.576 v1(142.867,136.576)
$1N9437: R1.1 U5.37 | length 2.5
  Top Layer w0.254: R1.1@133.782,149.605 134.569,148.818 U5.37@134.569,147.425
$1N11348: R2.1 U5.38 | length 19.3
  Top Layer w0.1: R2.1@116.943,142.926 130.226,142.926 133.782,146.482 133.782,147.412 U5.38@133.769,147.425
$1N11975: R7.1 U2.3 | length 1.5
  Top Layer w0.254: U2.3@95.042,97.473 95.047,97.468 R7.1@95.047,95.988
$1N12553: R10.2 USB1.B5 | length 1.7
  Top Layer w0.254: USB1.B5@90.678,84.788 91.909,84.788 R10.2@92.262,85.141
$1N12557: R9.2 USB1.A5 | length 2
  Top Layer w0.254: USB1.A5@90.678,87.788 91.716,87.788 R9.2@92.38,88.452
$1N14416: C18.2 L1.1 U6.5 | length 7.6
  Top Layer w0.254: L1.1@96.238,86.538 96.238,88.697 95.809,89.126 95.809,91.778 96.091,92.061 96.311,92.061 C18.2@96.317,92.067 97.829,92.067 U6.5@97.888,92.126
$1N14459: C18.1 U6.6 | length 1.8
  Top Layer w0.254: C18.1@96.317,91.677 96.818,91.176 U6.6@97.888,91.176
$1N14567: C19.1 R11.1 R12.2 U6.1 | length 11.6
  Top Layer w0.254: U6.1@100.588,91.176 104.571,91.176 C19.1@105.715,90.032 108.71,90.032 R11.1@108.763,90.085 111.667,90.085 R12.2@111.684,90.103
$1N14571: C19.2 C22.2 C23.2 L1.2 R11.2 | length 16.2
  Top Layer w0.254: L1.2@102.238,86.538 103.621,86.538 C19.2@105.715,88.632 108.71,88.632 R11.2@108.763,88.579 108.816,88.632 C23.2@114.478,88.632 C22.2@117.526,88.632
$1N16832: C24.2 L2.1 U7.5 | length 5.3
  Top Layer w0.254: C24.2@130.099,93.328 129.278,92.507 U7.5@128.782,92.507 128.788,92.501 L2.1@132.417,92.501
$1N16833: C24.1 U7.6 | length 1.4
  Top Layer w0.254: U7.6@128.782,93.457 129.037,93.712 130.093,93.712 C24.1@130.099,93.718
$1N16834: C25.1 R14.2 R15.1 U7.1 | length 30.7
  Top Layer w0.254: U7.1@126.082,93.457 126.377,93.457 127.432,92.402 127.432,91.662 135.731,83.363 142.799,83.363 143.667,84.231 R14.2@143.667,87.983 142.651,87.983 R15.1@142.135,87.466 142.081,87.413 C25.1@142.081,84.799
$1N17349: C29.2 C30.2 C31.1 C32.1 | length 3.8
  Top Layer w0.254: C30.2@124.325,98.73 125.4,97.655 C32.1@125.4,96.354 124.489,96.354 C29.2@124.452,96.317
$1N24377: R23.2 U1.P10 | length 20.2
  Top Layer w0.1: R23.2@91.289,140.767 93.904,140.767 94.01,140.661 94.01,140.473 94.626,139.857 96.846,139.857 v1(97.206,139.497)
  Top Layer w0.254: U1.P10@109.328,138.526 109.652,138.85 v1@109.652,138.862
  Bottom Layer w0.254: v1(97.206,139.497) 97.339,139.364 100.968,139.364 101.045,139.441 101.045,139.568 101.326,139.849 107.619,139.849 108.485,138.983 109.192,138.983 109.292,138.883 v1(109.673,138.883)
$1N24422: R24.2 U1.N10 | length 23.9
  Top Layer w0.1: v1(94.92,139.455) 96.679,139.455 97.039,139.095 97.373,139.095 97.733,139.455 97.926,139.455 99.17,140.699 99.17,140.704 99.806,141.34 100.599,141.34 101.431,140.508 104.054,140.508 104.146,140.416 104.146,139.968 104.37,139.744 105.486,139.744 105.493,139.751 105.963,139.751 105.97,139.744 106.286,139.744 106.51,139.968 106.51,140.326 106.692,140.508 107.886,140.508 108.146,140.248 108.146,139.168 108.37,138.944 108.946,138.944 U1.N10@109.328,139.326
  Top Layer w0.254: R24.2@93.448,143.307 94.337,142.418 v1(95.174,142.418)
  Bottom Layer w0.1: v1(94.92,139.455) 94.666,139.709 94.666,140.334 95.374,141.042 95.374,141.466 95.301,141.539 95.301,141.783 95.174,141.91 v1(95.174,142.418)
$1N24492: R25.2 U1.R10 | length 17.1
  Top Layer w0.1: R25.2@100.254,130.405 100.254,137.338 101.016,138.1 101.962,138.1 101.97,138.108 102.286,138.108 102.51,137.884 102.51,137.395 102.567,137.338 102.667,137.338 102.673,137.344 108.686,137.344 109.068,137.726 U1.R10@109.328,137.726
$1N29790: R26.2 U2.5 | length 59.1
  Top Layer w0.1: v1(85.133,137.592) 85.395,137.854 R26.2@85.395,138.429 ; U2.5@97.582,97.473 97.587,97.468 v1(97.587,96.444)
  Bottom Layer w0.1: v1(85.133,137.592) 85.014,137.473 85.014,137.16 84.885,137.032 84.885,136.76 85.014,136.632 85.014,136.36 84.885,136.232 84.885,135.96 85.014,135.832 85.014,135.56 84.885,135.432 84.885,135.16 85.014,135.032 85.014,134.76 84.885,134.632 84.885,134.36 85.014,134.232 85.014,133.96 84.885,133.832 84.885,133.56 85.014,133.432 85.014,133.16 84.885,133.032 84.885,132.76 85.014,132.632 85.014,95.301 86.284,94.031 95.174,94.031 v1(97.587,96.444)
$1N29833: R27.2 U2.6 | length 59.2
  Top Layer w0.1: v1(85.812,137.556) 85.812,137.703 R27.2@86.538,138.429 ; v1(98.852,96.444) U2.6@98.852,97.473
  Bottom Layer w0.1: v1(85.812,137.556) 85.522,137.266 85.522,136.995 85.451,136.924 85.314,136.924 85.243,136.854 85.243,136.595 85.314,136.524 85.451,136.524 85.522,136.454 85.522,136.195 85.451,136.124 85.314,136.124 85.243,136.054 85.243,135.795 85.314,135.724 85.451,135.724 85.522,135.654 85.522,135.395 85.451,135.324 85.314,135.324 85.243,135.254 85.243,134.995 85.314,134.924 85.451,134.924 85.522,134.854 85.522,134.595 85.451,134.524 85.314,134.524 85.243,134.454 85.243,134.195 85.314,134.124 85.451,134.124 85.522,134.054 85.522,133.795 85.451,133.724 85.314,133.724 85.243,133.654 85.243,133.395 85.314,133.324 85.451,133.324 85.522,133.254 85.522,132.995 85.451,132.924 85.314,132.924 85.243,132.854 85.243,132.595 85.314,132.524 85.451,132.524 85.522,132.454 85.522,132.195 85.451,132.124 85.314,132.124 85.243,132.054 85.243,131.795 85.314,131.724 85.451,131.724 85.522,131.654 85.522,131.431 85.451,131.36 85.314,131.36 85.243,131.29 85.243,131.031 85.314,130.96 85.451,130.96 85.522,130.89 85.522,130.631 85.451,130.56 85.314,130.56 85.243,130.49 85.243,130.231 85.314,130.16 85.451,130.16 85.522,130.09 85.522,129.831 85.451,129.76 85.314,129.76 85.243,129.69 85.243,129.431 85.314,129.36 85.451,129.36 85.522,129.29 85.522,98.984 87.3,97.206 98.09,97.206 v1(98.852,96.444)
$1N29916: R29.2 U2.9 | length 59.1
  Top Layer w0.1: v1(87.123,137.388) 87.478,137.388 88.52,138.429 R29.2@88.824,138.429 ; v1(101.27,99.238) 102.662,97.846 U2.9@102.662,97.473
  Bottom Layer w0.1: v1(87.123,137.388) 86.921,137.186 86.865,137.186 86.592,136.913 86.592,136.616 86.663,136.546 86.848,136.546 86.919,136.475 86.919,136.216 86.848,136.146 86.663,136.146 86.592,136.075 86.592,135.816 86.663,135.746 86.848,135.746 86.919,135.675 86.919,135.416 86.848,135.346 86.663,135.346 86.592,135.275 86.592,135.016 86.663,134.946 86.848,134.946 86.919,134.875 86.919,134.616 86.848,134.546 86.663,134.546 86.592,134.475 86.592,134.216 86.663,134.146 86.848,134.146 86.919,134.075 86.919,133.816 86.848,133.746 86.663,133.746 86.592,133.675 86.592,133.416 86.663,133.346 86.848,133.346 86.919,133.275 86.919,133.016 86.848,132.946 86.663,132.946 86.592,132.875 86.592,132.661 86.663,132.591 86.848,132.591 86.919,132.52 86.919,132.261 86.848,132.191 86.663,132.191 86.592,132.12 86.592,131.861 86.663,131.791 86.848,131.791 86.919,131.72 86.919,131.461 86.848,131.391 86.663,131.391 86.592,131.32 86.592,102.486 89.84,99.238 v1(101.27,99.238)
$1N29959: R30.2 U2.12 | length 59.5
  Top Layer w0.1: v1(88.062,137.338) 88.876,137.338 R30.2@89.967,138.429 ; v1(98.603,100.762) 105.461,100.762 106.472,99.751 U2.12@106.472,97.473
  Bottom Layer w0.1: v1(88.062,137.338) 87.642,137.338 87.29,136.986 87.29,136.976 87.246,136.932 87.246,103.991 90.475,100.762 v1(98.603,100.762)
$1N30002: R31.2 U2.23 | length 58.9
  Top Layer w0.1: v1(88.443,110.414) 108.255,110.414 109.271,109.398 U2.23@110.165,109.398 ; v1@89.332,137.338 90.019,137.338 R31.2@91.11,138.429
  Bottom Layer w0.1: v1(88.443,110.414) 87.847,111.01 87.847,126.348 87.776,126.419 87.546,126.419 87.475,126.489 87.475,126.748 87.546,126.819 87.776,126.819 87.847,126.889 87.847,127.148 87.776,127.219 87.546,127.219 87.475,127.289 87.475,127.548 87.546,127.619 87.776,127.619 87.847,127.689 87.847,127.948 87.776,128.019 87.546,128.019 87.475,128.089 87.475,128.348 87.546,128.419 87.776,128.419 87.847,128.489 87.847,128.748 87.776,128.819 87.546,128.819 87.475,128.889 87.475,129.148 87.546,129.219 87.776,129.219 87.847,129.289 87.847,129.548 87.776,129.619 87.546,129.619 87.475,129.689 87.475,129.948 87.546,130.019 87.776,130.019 87.847,130.089 87.847,130.348 87.776,130.419 87.546,130.419 87.475,130.489 87.475,130.748 87.546,130.819 87.776,130.819 87.847,130.889 87.847,131.148 87.776,131.219 87.546,131.219 87.475,131.289 87.475,131.548 87.546,131.619 87.776,131.619 87.847,131.689 87.847,131.948 87.776,132.019 87.546,132.019 87.475,132.089 87.475,132.348 87.546,132.419 87.776,132.419 87.847,132.489 87.847,132.748 87.776,132.819 87.546,132.819 87.475,132.889 87.475,133.148 87.546,133.219 87.776,133.219 87.847,133.289 87.847,133.548 87.776,133.619 87.546,133.619 87.475,133.689 87.475,133.948 87.546,134.019 87.776,134.019 87.847,134.089 87.847,134.886 87.446,135.287 87.446,136.57 87.725,136.849 88.574,136.849 89.007,137.282 v1(89.388,137.282)
$1N30085: R34.2 U2.25 | length 59.4
  Top Layer w0.1: v1@91.491,137.084 92.178,137.084 93.396,138.302 R34.2@93.396,138.429 ; v1(91.999,112.065) 92.126,111.938 92.934,111.938 93.005,112.009 93.005,112.248 93.076,112.319 93.334,112.319 93.405,112.248 93.405,112.009 93.476,111.938 93.734,111.938 93.805,112.009 93.805,112.248 93.876,112.319 94.134,112.319 94.205,112.248 94.205,112.009 94.276,111.938 94.534,111.938 94.605,112.009 94.605,112.248 94.676,112.319 94.934,112.319 95.005,112.248 95.005,112.009 95.076,111.938 95.334,111.938 95.405,112.009 95.405,112.248 95.476,112.319 95.734,112.319 95.805,112.248 95.805,112.009 95.876,111.938 96.134,111.938 96.205,112.009 96.205,112.248 96.276,112.319 96.534,112.319 96.605,112.248 96.605,112.009 96.676,111.938 U2.25@110.165,111.938
  Bottom Layer w0.1: v1(91.484,137.091) 89.459,135.067 89.459,134.746 89.53,134.675 89.896,134.675 89.967,134.605 89.967,134.346 89.896,134.275 89.53,134.275 89.459,134.205 89.459,133.946 89.53,133.875 89.886,133.875 89.957,133.805 89.957,133.546 89.886,133.475 89.53,133.475 89.459,133.405 89.459,133.146 89.53,133.075 89.895,133.075 89.966,133.005 89.966,132.746 89.895,132.675 89.53,132.675 89.459,132.605 89.459,132.346 89.53,132.275 89.886,132.275 89.957,132.205 89.957,131.946 89.886,131.875 89.53,131.875 89.459,131.805 89.459,131.546 89.53,131.475 89.931,131.475 90.001,131.405 90.001,131.146 89.931,131.075 89.53,131.075 89.459,131.005 89.459,130.746 89.53,130.675 89.958,130.675 90.028,130.605 90.028,130.346 89.958,130.275 89.53,130.275 89.459,130.205 89.459,129.946 89.53,129.875 90.003,129.875 90.073,129.805 90.073,129.546 90.003,129.475 89.53,129.475 89.459,129.405 89.459,129.191 89.53,129.12 90.009,129.12 90.08,129.049 90.08,128.791 90.009,128.72 89.53,128.72 89.459,128.649 89.459,128.391 89.53,128.32 90.009,128.32 90.08,128.249 90.08,127.991 90.009,127.92 89.53,127.92 89.151,127.541 89.151,114.913 v1(91.999,112.065)
$1N30089: R32.2 U2.24 | length 59.6
  Top Layer w0.1: v1(90.475,137.211) 91.035,137.211 R32.2@92.253,138.429 ; v1(91.745,111.43) 108.128,111.43 108.89,110.668 U2.24@110.165,110.668
  Bottom Layer w0.1: v1(90.475,137.211) 89.913,136.649 88.912,136.649 88.316,136.053 88.316,134.321 88.387,134.251 88.88,134.251 88.951,134.18 88.951,133.921 88.88,133.851 88.387,133.851 88.316,133.78 88.316,133.521 88.387,133.451 88.88,133.451 88.951,133.38 88.951,133.121 88.88,133.051 88.387,133.051 88.316,132.98 88.316,132.721 88.387,132.651 88.88,132.651 88.951,132.58 88.951,132.321 88.88,132.251 88.387,132.251 88.316,132.18 88.316,131.921 88.387,131.851 88.88,131.851 88.951,131.78 88.951,131.521 88.88,131.451 88.387,131.451 88.316,131.38 88.316,131.121 88.387,131.051 88.88,131.051 88.951,130.98 88.951,130.721 88.88,130.651 88.387,130.651 88.316,130.58 88.316,130.321 88.387,130.251 88.88,130.251 88.951,130.18 88.951,129.921 88.88,129.851 88.387,129.851 88.316,129.78 88.316,129.521 88.387,129.451 88.88,129.451 88.951,129.38 88.951,129.121 88.88,129.051 88.387,129.051 88.316,128.98 88.316,128.721 88.387,128.651 88.88,128.651 88.951,128.58 88.951,128.321 88.88,128.251 88.387,128.251 88.316,128.18 88.316,127.921 88.387,127.851 88.88,127.851 88.951,127.78 88.951,127.521 88.88,127.451 88.387,127.451 88.316,127.38 88.316,114.859 v1(91.745,111.43)
$1N30093: R28.2 U2.7 | length 59.1
  Top Layer w0.1: v1(86.444,137.465) 86.505,137.465 87.47,138.429 R28.2@87.681,138.429 ; U2.7@100.122,97.473 v1(100.122,98.476)
  Bottom Layer w0.1: v1(86.444,137.465) 85.776,136.797 85.776,136.553 85.847,136.482 85.959,136.482 86.03,136.411 86.03,136.153 85.959,136.082 85.847,136.082 85.776,136.011 85.776,135.753 85.847,135.682 85.959,135.682 86.03,135.611 86.03,135.353 85.959,135.282 85.847,135.282 85.776,135.211 85.776,134.953 85.847,134.882 85.959,134.882 86.03,134.811 86.03,134.553 85.959,134.482 85.847,134.482 85.776,134.411 85.776,134.153 85.847,134.082 85.959,134.082 86.03,134.011 86.03,133.753 85.959,133.682 85.847,133.682 85.776,133.611 85.776,133.353 85.847,133.282 85.959,133.282 86.03,133.211 86.03,132.953 85.959,132.882 85.847,132.882 85.776,132.811 85.776,132.553 85.847,132.482 85.959,132.482 86.03,132.411 86.03,132.153 85.959,132.082 85.847,132.082 85.776,132.011 85.776,131.753 85.847,131.682 85.959,131.682 86.03,131.611 86.03,131.353 85.959,131.282 85.847,131.282 85.776,131.211 85.776,130.961 85.847,130.89 86.086,130.89 86.157,130.819 86.157,130.561 86.086,130.49 85.847,130.49 85.776,130.419 85.776,130.161 85.847,130.09 86.086,130.09 86.157,130.019 86.157,129.761 86.086,129.69 85.847,129.69 85.776,129.619 85.776,99.746 87.046,98.476 v1(100.122,98.476)
$1N33205: P1.8 R35.1 | length 5.1
  Top Layer w0.254: P1.8@90.08,125.695 90.101,125.673 91.689,125.673 91.786,125.576 R35.1@95.108,125.576
$1N36431: C37.2 U1.F6 | length 1.9
  Top Layer w0.1: v1(104.968,145.333) 104.994,145.308 105.486,145.308 105.868,144.926 U1.F6@106.128,144.926
  Bottom Layer w0.1: v1(104.968,145.333) 105.355,145.72 C37.2@105.393,145.72
$1N36495: C38.2 U1.F7 | length 1
  Top Layer w0.1: U1.F7@106.928,144.926 v1@107.309,145.307
  Bottom Layer w0.1: v1(107.334,145.307) 107.425,145.398 C38.2@107.425,145.72
$1N36552: C39.2 U1.F10 | length 1.7
  Top Layer w0.1: v1(108.928,146.079) 108.928,145.326 U1.F10@109.328,144.926
  Bottom Layer w0.1: v1(108.928,146.079) 108.949,146.099 C39.2@108.949,146.482
$1N36571: C40.2 U1.F11 | length 1
  Top Layer w0.1: v1(109.854,144.604) 110.128,144.878 U1.F11@110.128,144.926
  Bottom Layer w0.1: v1(109.854,144.604) 110.192,144.604 110.346,144.45
$1N36646: C41.2 U1.G6 | length 1.1
  Top Layer w0.1: U1.G6@106.128,144.126 106.528,144.526 v1(106.528,144.574)
  Bottom Layer w0.1: C41.2@106.35,144.137 106.528,144.315 v1(106.528,144.574)
$1N36690: C42.2 U1.G7 | length 1.6
  Top Layer w0.1: U1.G7@106.928,144.126 106.928,144.174 v1(107.328,144.574)
  Bottom Layer w0.1: v1(107.328,144.574) 107.555,144.574 107.678,144.451 107.678,144.391 107.914,144.155 107.974,144.155 C42.2@108.06,144.069
$1N36752: C43.2 U1.G9 | length 1.3
  Top Layer w0.1: U1.G9@108.528,144.126 108.852,144.45 v1(108.89,144.45)
  Bottom Layer w0.1: v1(108.89,144.45) 109.189,144.749 109.189,144.791 109.203,144.805 C43.2@109.203,145.085
$1N36807: C44.2 U1.G11 | length 0.9
  Top Layer w0.1: v1(109.767,143.813) 110.08,144.126 U1.G11@110.128,144.126
  Bottom Layer w0.1: v1(109.767,143.813) 110.217,143.813 C44.2@110.219,143.815
$1N36895: C45.2 U1.H6 | length 1
  Top Layer w0.1: U1.H6@106.128,143.326 106.477,142.977 v1@106.477,142.926
  Bottom Layer w0.1: v1(106.577,142.925) 106.577,142.958 C45.2@106.858,143.239
$1N36953: C46.2 U1.H7 | length 1.3
  Top Layer w0.1: U1.H7@106.928,143.326 107.314,142.94 v1(107.314,142.893)
  Bottom Layer w0.1: v1(107.314,142.893) 107.601,143.18 C46.2@107.933,143.18
$1N37097: C47.2 U1.H11 | length 1
  Top Layer w0.1: v1@109.779,142.926 109.779,142.977 U1.H11@110.128,143.326
  Bottom Layer w0.1: C47.2@109.339,142.926 v1@109.776,142.926
  other v1: 109.777,142.928
$1N37150: C48.1 U1.L11 | length 1.3
  Top Layer w0.1: v1(109.779,141.275) U1.L11@110.128,140.926
  Bottom Layer w0.1: C48.1@109.72,140.513 109.779,140.572 v1(109.779,141.275)
$1N37245: C50.1 U1.L7 | length 1.8
  Top Layer w0.1: v1(105.728,141.374) 105.794,141.308 106.286,141.308 106.668,140.926 U1.L7@106.928,140.926
  Bottom Layer w0.1: C50.1@105.681,141.021 105.728,141.067 v1(105.728,141.374)
$1N37295: C51.1 U1.L6 | length 2.7
  Top Layer w0.1: v1(104.88,141.326) 104.91,141.296 104.91,140.804 105.201,140.513 105.715,140.513 U1.L6@106.128,140.926
  Bottom Layer w0.1: C51.1@104.259,141.275 104.829,141.275 v1(104.88,141.326)
$1N37345: C52.1 U1.K11 | length 1.2
  Top Layer w0.1: v1@109.652,142.037 109.817,142.037 U1.K11@110.128,141.726
  Bottom Layer w0.1: v1(109.711,142.096) 110.278,142.096 C52.1@110.287,142.105
$1N37361: C49.1 U1.L10 | length 0.9
  Top Layer w0.1: v1(109.017,141.275) 109.328,140.964 U1.L10@109.328,140.926
  Bottom Layer w0.1: C49.1@108.958,141.656 108.958,141.334 v1(109.017,141.275)
$1N37409: C53.1 U1.L9 | length 1.2
  Top Layer w0.1: v1(108.211,141.229) 108.225,141.229 U1.L9@108.528,140.926
  Bottom Layer w0.1: v1(108.211,141.229) 108.353,141.229 108.704,140.878 C53.1@108.704,140.767
$1N37470: C54.1 U1.L8 | length 1
  Top Layer w0.1: v1(107.357,141.247) 107.407,141.247 U1.L8@107.728,140.926
  Bottom Layer w0.1: 106.926,141.402 107.202,141.402 v1(107.357,141.247)
$1N37518: C55.1 U1.J11 | length 1.1
  Top Layer w0.1: U1.J11@110.128,142.526 110.528,142.926 v1(110.541,142.926)
  Bottom Layer w0.1: v1(110.541,142.926) C55.1@111.108,142.926
$1N37600: C56.1 U1.J6 | length 1.8
  Top Layer w0.1: v1@104.953,142.164 105.15,142.164 105.17,142.144 105.746,142.144 U1.J6@106.128,142.526
  Bottom Layer w0.1: C56.1@104.513,142.164 104.937,142.164 v1(104.945,142.156)
$1N37637: C57.1 U1.J7 | length 1.1
  Top Layer w0.1: U1.J7@106.928,142.526 107.239,142.215 v1@107.239,142.164
  Bottom Layer w0.1: v1(107.239,142.205) 107.679,142.645 107.679,142.672
$1N41066: C48.2 C50.2 C51.2 C52.2 C55.2 C56.2 C57.2 C59.1 | length 14.8
  Bottom Layer w0.1: C51.2@103.869,141.275 103.869,141.91 C56.2@104.123,142.164 104.148,142.164 104.206,142.106 104.206,141.97 104.324,141.852 104.46,141.852 104.584,141.728 105.047,141.728 105.282,141.493 105.282,141.03 C50.2@105.291,141.021 105.291,141.613 105.461,141.783 105.76,141.783 106.26,142.283 106.593,142.283 107.072,141.803 107.494,141.803 108.069,142.452 C57.2@108.069,142.545 109.144,142.545 109.342,142.347 109.342,142.295 109.309,142.262 109.309,141.802 109.434,141.677 109.946,141.677 110.056,141.567 110.266,141.567 110.287,141.588 ; C48.2@110.101,140.513 110.287,140.699 110.287,141.588 ; C59.1@112.192,144.131 112.192,143.62 C55.2@111.498,142.926 111.415,142.843 111.415,142.732 110.481,141.798 110.37,141.798 C52.2@110.287,141.715 110.287,141.588
$1N47813: C41.1 C42.1 C43.1 C61.1 | length 5.6
  Bottom Layer w0.1: C61.1@105.653,143.688 106.345,143.688 106.487,143.83 ; C41.1@106.35,143.747 106.35,143.815 106.365,143.83 106.487,143.83 ; C43.1@109.593,145.085 109.593,144.912 109.389,144.708 109.389,144.381 109.113,144.105 109.113,143.996 108.45,143.996 108.45,143.857 108.35,143.757 107.871,143.757 107.715,143.913 107.715,144.071 107.615,144.172 106.885,144.172 106.544,143.83 106.487,143.83
+1V1: C25.2 C27.2 C28.2 C49.2 C53.2 C54.2 C61.2 L2.2 pad.55@111.811,127.407 pad.55@140.681,91.433 R15.2 | length 81.7
  Top Layer w0.1: C25.2@140.681,84.799 C28.2@140.681,90.133 pad.55@140.681,91.433 C27.2@140.681,92.546
  Top Layer w0.254: v1(111.894,126.924) 138.417,100.401 L2.2@138.417,92.501 138.462,92.546 C27.2@140.681,92.546
  Bottom Layer w0.1: C61.2@104.253,143.688 103.429,142.864 103.429,141.021 103.81,140.64 106.686,140.64 106.873,140.827 ; C54.2@106.409,141.402 106.492,141.319 106.492,141.208 106.873,140.827 ; C49.2@108.568,141.656 108.001,141.656 107.841,141.496 107.841,141.427 107.809,141.396 107.809,141.062 108.044,140.827 ; pad.55@111.811,127.407 111.811,134.544 111.176,135.179 111.176,138.481 109.271,140.386 108.695,140.386 108.626,140.455 108.515,140.455 108.397,140.573 108.397,140.684 C53.2@108.314,140.767 108.254,140.827 108.044,140.827 ; 106.873,140.827 108.044,140.827
  Bottom Layer w0.254: pad.55@111.811,127.407 111.811,127.007 v1(111.894,126.924)
+1V8: C29.1 C32.2 C36.1 P1.10 pad.55@92.294,119.92 pad.55@123.445,95.264 U8.2 | length 66
  Top Layer w0.254: P1.10@90.08,126.695 91.092,126.695 v1(91.111,126.713) 91.154,126.67 C36.1@91.677,126.67 ; v1(94.412,118.161) 105.08,118.161 108.255,121.336 112.065,121.336 119.05,114.351 119.05,99.261 U8.2@121.965,96.346 ; C29.1@124.062,96.317 121.994,96.317 123.047,95.264 pad.55@123.445,95.264 C32.2@125.4,95.264
  Bottom Layer w0.254: v1(91.111,126.713) 90.729,126.331 90.729,121.485 pad.55@92.294,119.92 94.053,118.161 v1(94.412,118.161)
+3V3: C8.2 C17.2 C34.1 C35.1 C37.1 C38.1 C39.1 C40.1 C44.1 C45.1 C46.1 C47.1 C58.1 C58.2 C59.2 CARD1.4 H1.5 P1.4 P1.11 pad.55@91.364,123.622 pad.55@94.254,146.63 pad.55@130.607,166.548 R3.1 R4.1 R5.2 R7.2 R16.2 R17.2 R18.2 R19.2 R20.2 R21.2 R22.2 R23.1 U2.2 U9.1 U9.4 | length 69.1
  Top Layer w0.1: v1(89.588,140.524) 89.831,140.767 R23.1@90.423,140.767 ; P1.11@90.08,127.194 92.043,127.194 92.576,126.662 92.576,126.549 92.694,126.431 92.805,126.431 C35.1@92.888,126.348 ; pad.55@94.254,146.63 v1(94.741,147.117) 95.433,147.117 95.435,147.119 ; v1(95.301,149.276) R18.2@96.326,149.276 ; v1(95.428,143.222) 95.513,143.307 R17.2@96.326,143.307 ; v1@96.326,150.546 R19.2@96.326,151.943
  Top Layer w0.254: P1.11@90.08,127.194 89.285,127.194 88.697,126.606 88.697,124.283 89.214,123.765 90.009,123.765 P1.4@90.08,123.695 91.356,123.695 v1(91.999,123.695) 92.072,123.622 C34.1@92.693,123.622 ; CARD1.4@93.423,161.011 93.423,149.131 95.435,147.119 R20.2@96.326,146.228 ; U2.2@93.772,97.473 93.65,97.351 v1(93.65,94.539) 94.464,94.539 R7.2@95.047,95.122 99.642,95.122 R5.2@100.456,95.936 ; R16.2@96.322,140.589 96.397,140.513 v1(96.952,140.513) ; R21.2@103.937,94.614 R22.2@105.207,94.614 104.572,93.979 v1(104.572,93.523) ; v1(108.763,160.071) 110.09,160.071 ; U9.1@110.965,159.196 110.09,160.071 ; U9.4@110.965,160.946 110.09,160.071 ; R3.1@112.752,108.128 112.827,108.203 v1(112.827,109.017) ; v1(112.827,99.873) R4.1@112.827,100.837 ; v1(143.815,139.116) C8.2@143.815,140.656
  Top Layer w1: pad.55@130.607,166.548 H1.5@130.607,168.58
  Bottom Layer w0.1: v1@105.715,146.228 105.783,146.16 C37.1@105.783,145.72 ; C45.1@106.858,143.629 107.193,143.629 v1(107.313,143.749) 107.57,143.492 108.122,143.492 108.24,143.374 108.24,143.263 C46.1@108.323,143.18 108.695,143.18 C47.1@108.949,142.926 ; C38.1@107.815,145.72 108.718,145.72 108.761,145.677 109.094,145.677 109.33,145.912 109.33,146.473 C39.1@109.339,146.482 109.42,146.482 v1(109.76,146.141) 110.857,147.238 C58.2@110.857,147.244 C58.1@112.257,147.244 112.257,145.596 C59.2@112.192,145.531 111.944,145.531 C40.1@110.863,144.45 110.863,144.069 C44.1@110.609,143.815
  other v1: 95.174,140.273 105.715,146.161 112.134,146.169 96.292,150.513
+5V: C20.2 C26.2 C30.1 C31.2 C33.2 pad.55@96.298,82.747 U6.2 U6.3 U7.2 U7.3 U8.3 USB1.A4B9 USB1.B4A9 | length 71.9
  Top Layer w0.254: USB1.A4B9@90.678,88.938 90.081,88.938 88.443,87.3 88.443,85.904 89.988,84.359 90.457,84.359 USB1.B4A9@90.678,84.138 92.008,84.138 ; C33.2@92.396,82.22 92.396,83.75 92.008,84.138 ; 95.047,83.998 pad.55@96.298,82.747 96.952,82.093 C20.2@97.522,82.093 ; U6.3@100.588,93.076 U6.2@100.588,92.126 ; U8.3@121.965,98.646 122.268,98.646 U8.3@122.352,98.73 ; C30.1@123.935,98.73 U8.3@122.352,98.73 ; U7.2@126.082,92.507 U7.3@126.082,91.557 125.956,91.683 C26.2@123.876,91.683 ; 92.008,84.138 97.219,84.138 98.984,85.903 98.984,90.856 100.254,92.126 U6.2@100.588,92.126 ; U6.2@100.588,92.126 100.754,92.292 123.267,92.292 C26.2@123.876,91.683 ; U8.3@122.352,98.73 123.749,100.127 125.019,100.127 126.453,98.693 C31.2@126.453,97.714 126.453,95.073 123.876,92.496 C26.2@123.876,91.683